# EAGLE board #1 (EAGLE 9.6.2)

Size 90.15 x 102.54 mm. Coordinates in mm from the lower left corner, seen from the top.
Outline: 0,0 90.15,0 90.15,102.54 0,102.54 0,0
Copper layers (1*16): Top 0.035mm / dielectric 1.5mm / Bottom 0.035mm
Design rules "default": minimum track width 6mil, minimum drill 0.35mm, track to track 6mil, track to pad 6mil, pad to pad 6mil, via to via 6mil, smd to smd 6mil, copper to edge 40mil, drill to drill 6mil, minimum pad ring 10mil, minimum via ring 8mil, stop-mask expansion 4mil, vias tented up to drill 0mil, thermal gap 10mil

## Footprints (pad centres in the part's own frame; a part is rotated, then mirrored left to right if it is on the bottom)
C025-025X050 = drill 0.813 octagon: 1 -1.27,0; 2 1.27,0
E5-10,5 = drill 1.016 pad 2.54: + -2.54,0 | drill 1.016 pad 2.54 octagon: - 2.54,0
DIL18 = drill 0.813 long: 1 -10.16,-3.81; 2 -7.62,-3.81; 3 -5.08,-3.81; 4 -2.54,-3.81; 5 0,-3.81; 6 2.54,-3.81; 7 5.08,-3.81; 8 7.62,-3.81; 9 10.16,-3.81; 10 10.16,3.81; 11 7.62,3.81; 12 5.08,3.81; 13 2.54,3.81; 14 0,3.81; 15 -2.54,3.81; 16 -5.08,3.81; 17 -7.62,3.81; 18 -10.16,3.81
70543-16 = drill 1.016 long: 1 -19.05,0; 2 -16.51,0; 3 -13.97,0; 4 -11.43,0; 5 -8.89,0; 6 -6.35,0; 7 -3.81,0; 8 -1.27,0; 9 1.27,0; 10 3.81,0; 11 6.35,0; 12 8.89,0; 13 11.43,0; 14 13.97,0; 15 16.51,0; 16 19.05,0
DIP16 = drill 0.813 pad 1.626: 1 -8.89,-3.81; 2 -6.35,-3.81; 3 -3.81,-3.81; 4 -1.27,-3.81; 5 1.27,-3.81; 6 3.81,-3.81; 7 6.35,-3.81; 8 8.89,-3.81; 9 8.89,3.81; 10 6.35,3.81; 11 3.81,3.81; 12 1.27,3.81; 13 -1.27,3.81; 14 -3.81,3.81; 15 -6.35,3.81; 16 -8.89,3.81
WEMOS-D1-MINI = drill 1: JP1.1 -11.43,9.525; JP1.2 -11.43,6.985; JP1.3 -11.43,4.445; JP1.4 -11.43,1.905; JP1.5 -11.43,-0.635; JP1.6 -11.43,-3.175; JP1.7 -11.43,-5.715; JP1.8 -11.43,-8.255; JP2.1 11.43,9.525; JP2.2 11.43,6.985; JP2.3 11.43,4.445; JP2.4 11.43,1.905; JP2.5 11.43,-0.635; JP2.6 11.43,-3.175; JP2.7 11.43,-5.715; JP2.8 11.43,-8.255

## Placement (x,y rotation side)
C1  10nF  [C025-025X050]  35.56,80.01 90 top
C2  1000uF  [E5-10,5]  6.35,35.56 0 top
C3  10nF  [C025-025X050]  35.56,6.35 270 top
C4  10nF  [C025-025X050]  35.56,30.48 90 top
C5  10nF  [C025-025X050]  35.56,57.15 270 top
C6  10nF  [C025-025X050]  6.35,27.94 0 top
IC1  ULN2803  [DIL18]  62.23,62.23 270 top
IC2  ULN2803  [DIL18]  62.23,13.97 270 top
IC3  TD620831A  [DIL18]  62.23,38.1 270 top
IC4  TD620831A  [DIL18]  62.23,86.36 270 top
L  C-GRID-16-70543  [70543-16]  81.28,24.13 270 top
R  C-GRID-16-70543  [70543-16]  81.28,76.2 270 top
U1  SN74HC595N  [DIP16]  44.45,38.1 90 top
U2  SN74HC595N  [DIP16]  44.45,13.97 90 top
U3  SN74HC595N  [DIP16]  44.45,87.63 90 top
U4  SN74HC595N  [DIP16]  44.45,64.77 90 top
U$1  WEMOS-D1-MINI  [WEMOS-D1-MINI]  11.43,54.61 270 top

## Library data of the parts
C1-C6 = resistor
IC1 IC2 = uln-udn
IC3 IC4 = td62083-dil
L R = con-molex; MF: MOLEX; OC_FARNELL: unknown; OC_NEWARK: unknown
U1-U4 = SparkFun-IC-Logic; PROD_ID: IC-13123
U$1 = diy-modules

## Nets
3.3V: C1.1 C2.- C3.1 C4.1 C5.1 C6.2 IC1.9 IC2.9 IC3.10 IC4.10 U1.8 U2.8 U3.8 U4.8 U$1.JP2.7
3V3: U$1.JP1.8
N$1: IC2.1 U2.15
N$2: IC2.2 U2.1
N$3: IC2.3 U2.2
N$4: IC2.4 U2.3
N$5: IC2.5 U2.4
N$6: IC2.6 U2.5
N$7: IC2.7 U2.6
N$8: IC2.8 U2.7
N$9: IC3.18 L.1
N$10: IC3.17 L.2
N$11: IC3.16 L.3
N$12: IC3.15 L.4
N$13: IC3.14 L.5
N$14: IC3.13 L.6
N$15: IC3.12 L.7
N$16: IC3.11 L.8
N$17: IC2.11 L.16
N$18: IC2.12 L.15
N$19: IC2.13 L.14
N$20: IC2.14 L.13
N$21: IC2.15 L.12
N$22: IC2.16 L.11
N$23: IC2.17 L.10
N$24: IC2.18 L.9
N$26: IC4.17 R.2
N$28: IC4.15 R.4
N$30: IC4.13 R.6
N$31: IC3.8 U1.7
N$33: IC4.11 R.8
N$34: U1.14 U$1.JP1.5
N$35: IC4.8 U3.7
N$36: U1.12 U3.12 U$1.JP1.4
N$37: U2.14 U$1.JP2.5
N$38: U2.12 U4.12 U$1.JP2.3
N$39: IC1.11 R.16
N$40: IC1.12 R.15
N$41: IC3.1 U1.15
N$42: IC3.2 U1.1
N$43: IC3.3 U1.2
N$44: IC3.4 U1.3
N$45: IC3.5 U1.4
N$46: IC4.6 U3.5
N$47: IC3.7 U1.6
N$48: IC3.6 U1.5
N$49: IC1.13 R.14
N$50: IC1.14 R.13
N$51: IC1.15 R.12
N$52: IC1.16 R.11
N$53: IC1.17 R.10
N$54: IC1.18 R.9
N$57: IC4.18 R.1
N$59: IC4.16 R.3
N$61: IC4.14 R.5
N$63: IC4.12 R.7
N$72: IC4.1 U3.15
N$73: IC4.2 U3.1
N$74: IC4.3 U3.2
N$75: IC4.4 U3.3
N$76: IC4.5 U3.4
N$77: U2.9 U4.14
N$78: IC4.7 U3.6
N$79: U1.11 U3.11 U$1.JP1.3
N$80: U2.11 U4.11 U$1.JP2.4
N$83: IC1.1 U4.15
N$84: IC1.2 U4.1
N$85: IC1.3 U4.2
N$86: IC1.4 U4.3
N$87: IC1.5 U4.4
N$88: IC1.6 U4.5
N$89: IC1.7 U4.6
N$90: IC1.8 U4.7
N$92: U1.9 U3.14
VCC: C1.2 C2.+ C3.2 C4.2 C5.2 C6.1 IC3.9 IC4.9 U1.16 U2.16 U3.16 U4.16 U$1.JP2.8

## Tracks (layer width: path | path; a pad name or v marks a point on that pad's centre or on a via)
3.3V  (14 unrouted)
N$1  (1 unrouted)
N$2  (1 unrouted)
N$3  (1 unrouted)
N$4  (1 unrouted)
N$5  (1 unrouted)
N$6  (1 unrouted)
N$7  (1 unrouted)
N$8  (1 unrouted)
N$9  (1 unrouted)
N$10  (1 unrouted)
N$11  (1 unrouted)
N$12  (1 unrouted)
N$13  (1 unrouted)
N$14  (1 unrouted)
N$15  (1 unrouted)
N$16  (1 unrouted)
N$17  (1 unrouted)
N$18  (1 unrouted)
N$19  (1 unrouted)
N$20  (1 unrouted)
N$21  (1 unrouted)
N$22  (1 unrouted)
N$23  (1 unrouted)
N$24  (1 unrouted)
N$26  (1 unrouted)
N$28  (1 unrouted)
N$30  (1 unrouted)
N$31  (1 unrouted)
N$33  (1 unrouted)
N$34  (1 unrouted)
N$35  (1 unrouted)
N$36  (2 unrouted)
N$37  (1 unrouted)
N$38  (2 unrouted)
N$39  (1 unrouted)
N$40  (1 unrouted)
N$41  (1 unrouted)
N$42  (1 unrouted)
N$43  (1 unrouted)
N$44  (1 unrouted)
N$45  (1 unrouted)
N$46  (1 unrouted)
N$47  (1 unrouted)
N$48  (1 unrouted)
N$49  (1 unrouted)
N$50  (1 unrouted)
N$51  (1 unrouted)
N$52  (1 unrouted)
N$53  (1 unrouted)
N$54  (1 unrouted)
N$57  (1 unrouted)
N$59  (1 unrouted)
N$61  (1 unrouted)
N$63  (1 unrouted)
N$72  (1 unrouted)
N$73  (1 unrouted)
N$74  (1 unrouted)
N$75  (1 unrouted)
N$76  (1 unrouted)
N$77  (1 unrouted)
N$78  (1 unrouted)
N$79  (2 unrouted)
N$80  (2 unrouted)
N$83  (1 unrouted)
N$84  (1 unrouted)
N$85  (1 unrouted)
N$86  (1 unrouted)
N$87  (1 unrouted)
N$88  (1 unrouted)
N$89  (1 unrouted)
N$90  (1 unrouted)
N$92  (1 unrouted)
VCC  (12 unrouted)